# EAGLE board _X2 (EAGLE 8.4.0)
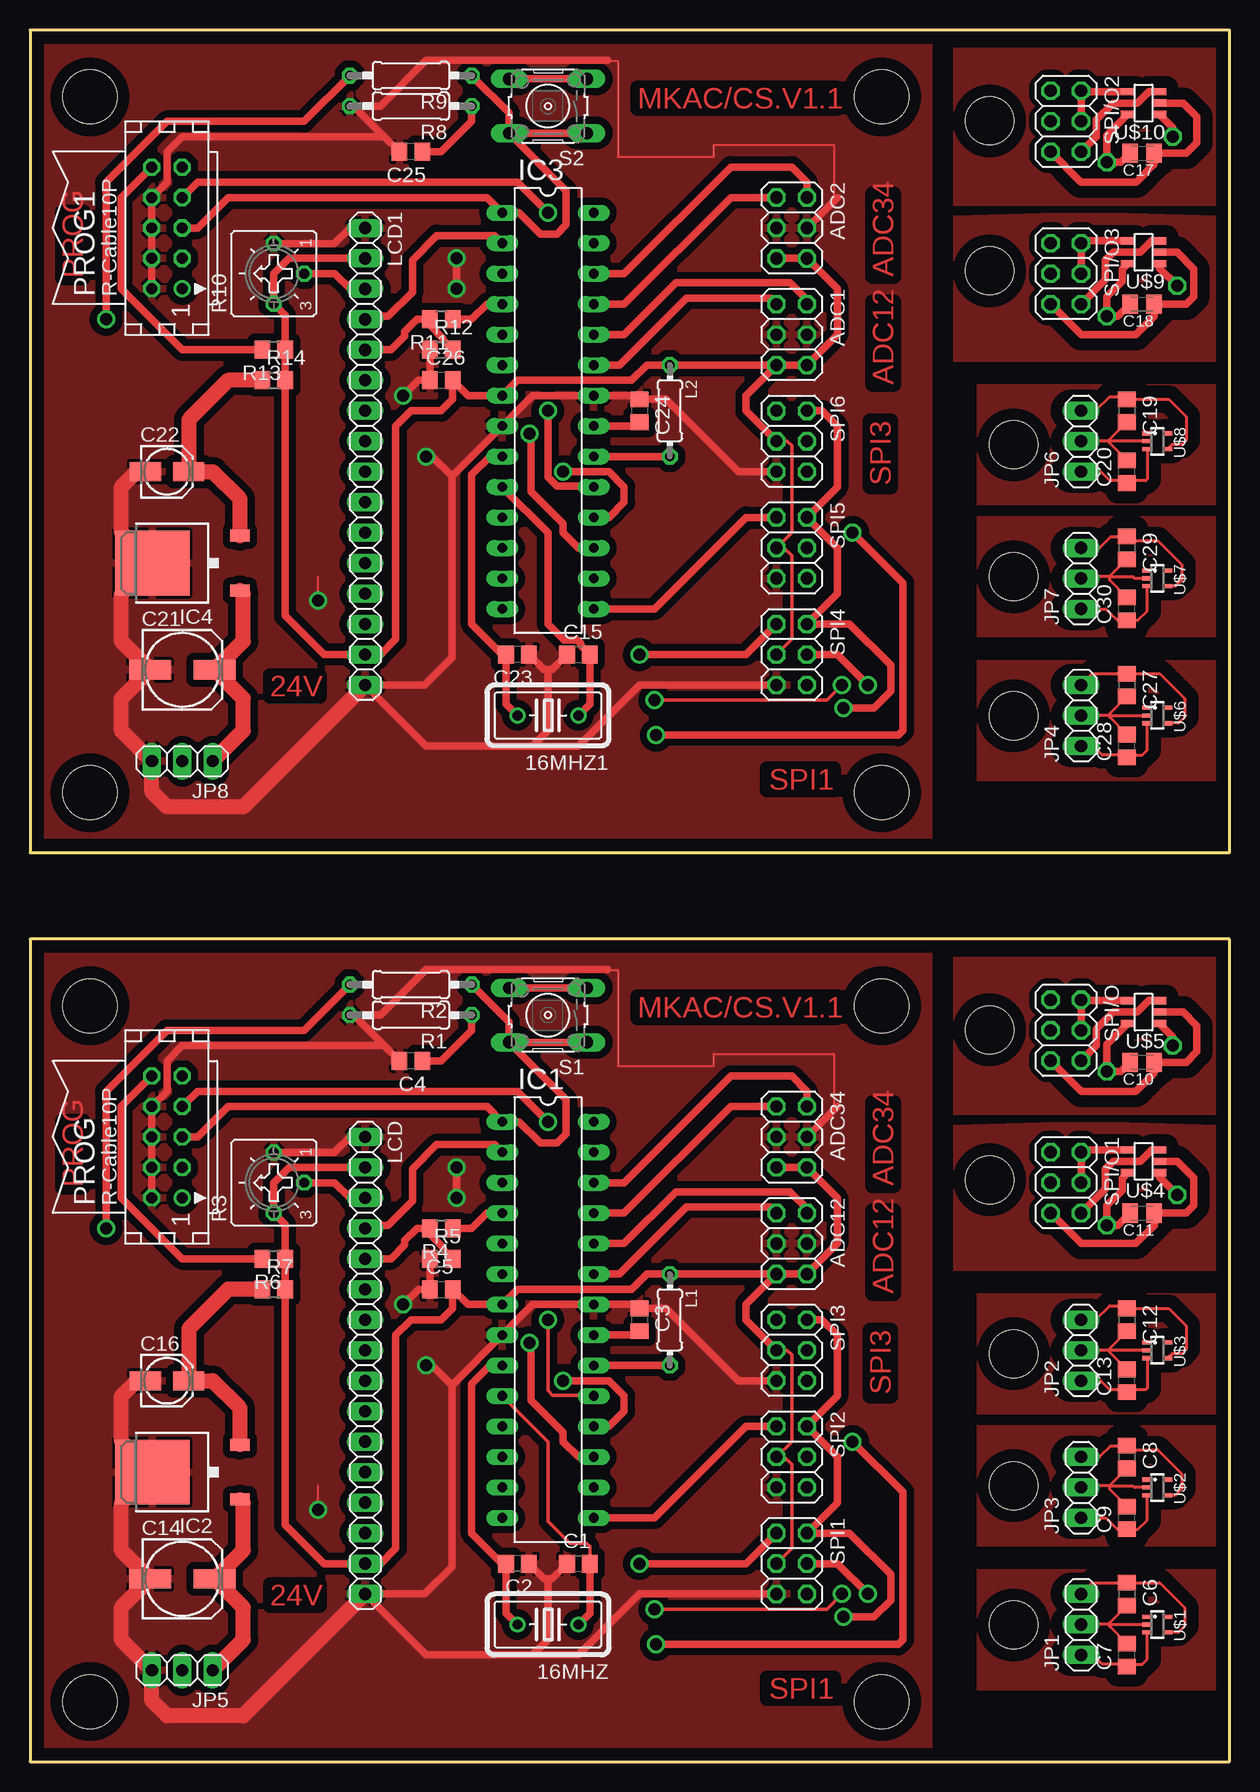
[diagram p0: board, top side]
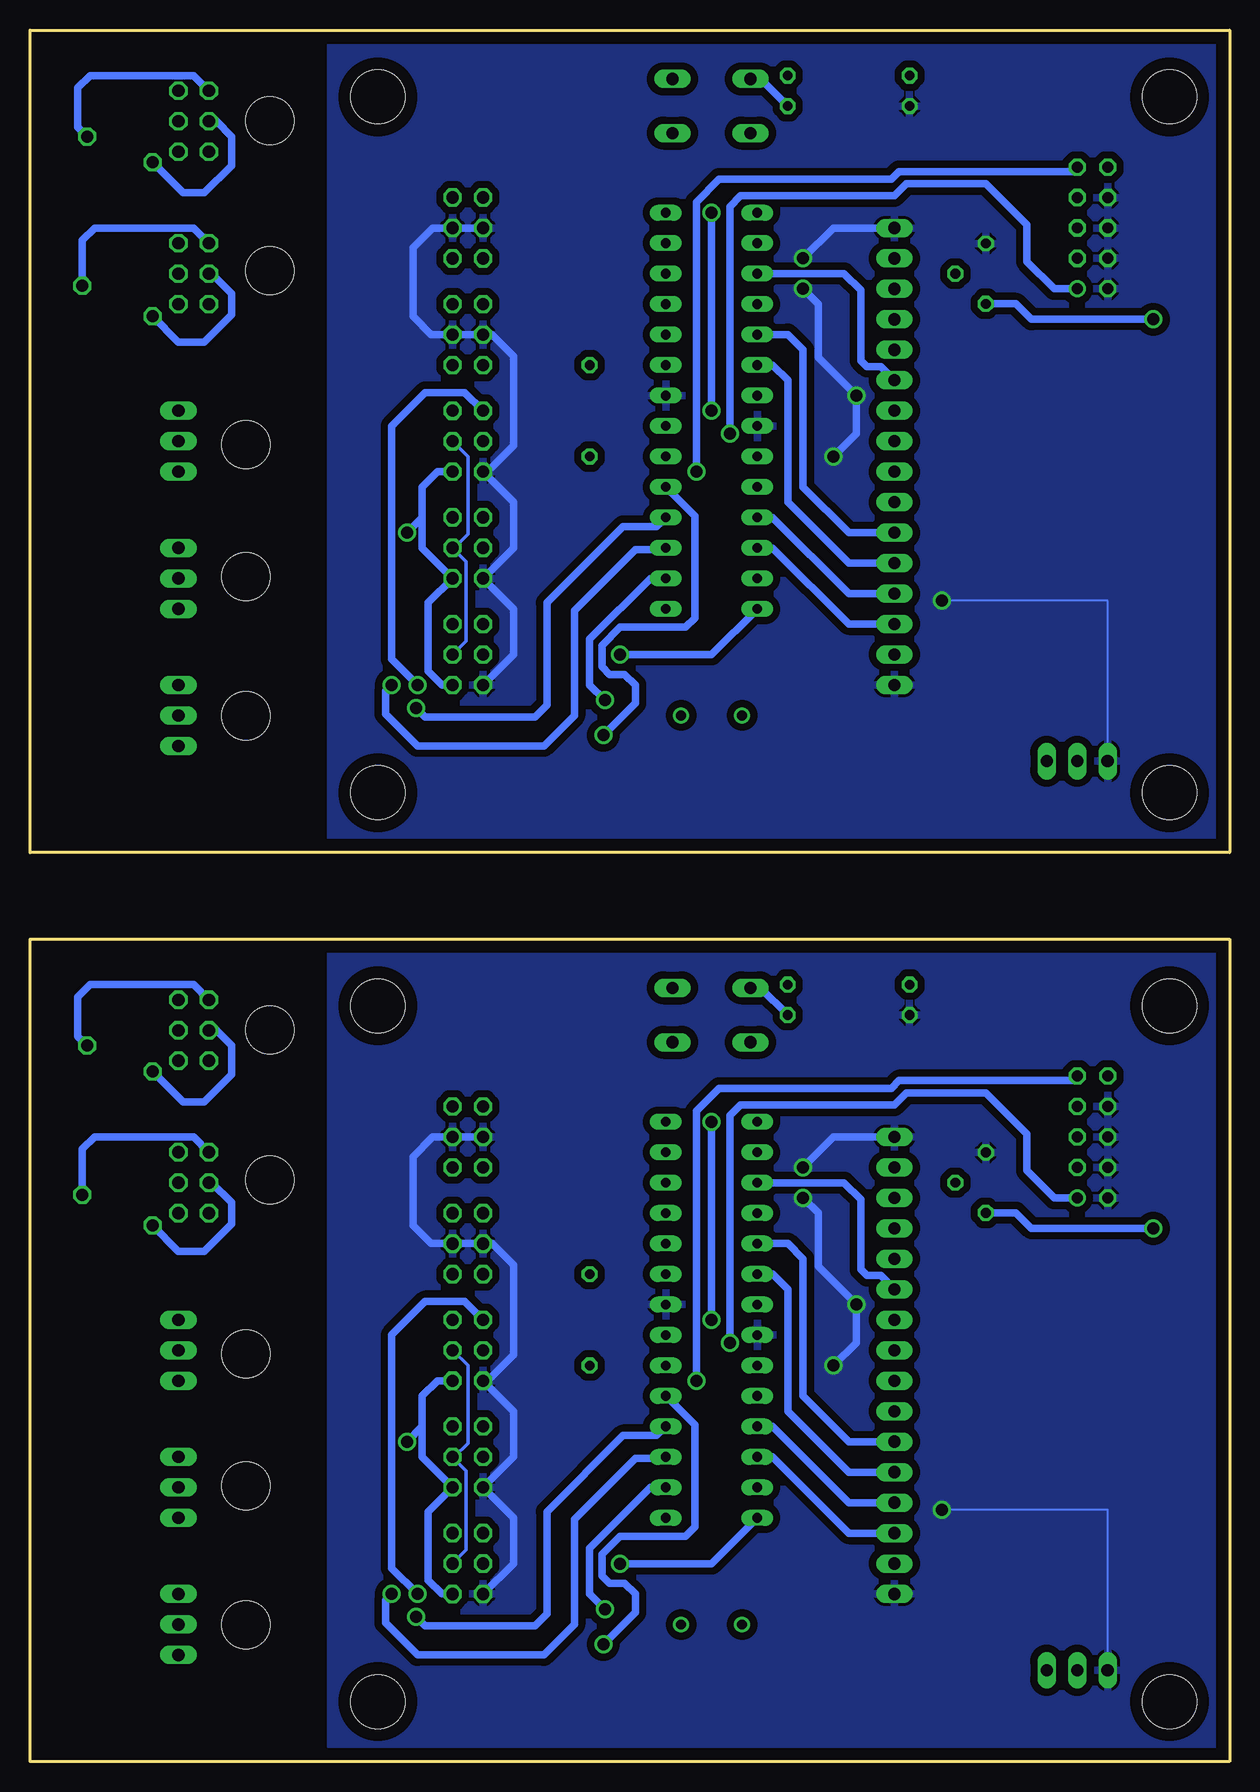
[diagram p1: board, bottom side, seen from below]

Size 100 x 144.34 mm. Coordinates in mm from the lower left corner, seen from the top.
Outline: 0,0 100,0 100,68.57 0,68.57 0,0
Outline: 0,75.77 100,75.77 100,144.34 0,144.34 0,75.77
Copper layers (1*16): Top 0.035mm / dielectric 1.5mm / Bottom 0.035mm
Design rules "default": minimum track width 6mil, minimum drill 0.35mm, track to track 6mil, track to pad 6mil, pad to pad 6mil, via to via 6mil, smd to smd 6mil, copper to edge 40mil, drill to drill 6mil, minimum pad ring 10mil, minimum via ring 8mil, stop-mask expansion 4mil, vias tented up to drill 0mil, thermal gap 10mil
Holes 4.5 mm at 71,5 5,63 71,63 5,5 71,80.77 5,138.77 71,138.77 5,80.77
Holes 4 mm at 82,11.4 82,23 82,34 80,48.5 80,61 82,87.17 82,98.77 82,109.77 80,124.27 80,136.77

## Footprints (pad centres in the part's own frame; a part is rotated, then mirrored left to right if it is on the bottom)
HC18U-V = drill 0.813: 1 -2.54,0; 2 2.54,0
2X03 = drill 1.016 octagon: 1 -2.54,-1.27; 2 -2.54,1.27; 3 0,-1.27; 4 0,1.27; 5 2.54,-1.27; 6 2.54,1.27
C0805 = smd 1.3 x 1.5: 1 -0.95,0; 2 0.95,0
C0805K = smd 1.3 x 1.6: 1 -1,0; 2 1,0
153CLV-0605 = smd 3.5 x 1.6: + 2.7,0; - -2.7,0
153CLV-0405 = smd 2.6 x 1.6: + 1.8,0; - -1.8,0
DIL28-3 = drill 0.813 long: 1 -16.51,-3.81; 2 -13.97,-3.81; 3 -11.43,-3.81; 4 -8.89,-3.81; 5 -6.35,-3.81; 6 -3.81,-3.81; 7 -1.27,-3.81; 8 1.27,-3.81; 9 3.81,-3.81; 10 6.35,-3.81; 11 8.89,-3.81; 12 11.43,-3.81; 13 13.97,-3.81; 14 16.51,-3.81; 15 16.51,3.81; 16 13.97,3.81; 17 11.43,3.81; 18 8.89,3.81; 19 6.35,3.81; 20 3.81,3.81; 21 1.27,3.81; 22 -1.27,3.81; 23 -3.81,3.81; 24 -6.35,3.81; 25 -8.89,3.81; 26 -11.43,3.81; 27 -13.97,3.81; 28 -16.51,3.81
TO252 = smd 1 x 1.6: 1 -2.28,-4.8; 2 2.28,-4.8 | smd 5.4 x 6.2: 3 0,2.5
1X03 = drill 1.016 long: 1 -2.54,0; 2 0,0; 3 2.54,0
0204/7 = drill 0.813 octagon: 1 -3.81,0; 2 3.81,0
1X16 = drill 1.016 long: 1 -19.05,0; 2 -16.51,0; 3 -13.97,0; 4 -11.43,0; 5 -8.89,0; 6 -6.35,0; 7 -3.81,0; 8 -1.27,0; 9 1.27,0; 10 3.81,0; 11 6.35,0; 12 8.89,0; 13 11.43,0; 14 13.97,0; 15 16.51,0; 16 19.05,0
CON10 = drill 0.914: 1 -5.08,-1.27 | drill 0.914 octagon: 2 -5.08,1.27; 3 -2.54,-1.27; 4 -2.54,1.27; 5 0,-1.27; 6 0,1.27; 7 2.54,-1.27; 8 2.54,1.27; 9 5.08,-1.27; 10 5.08,1.27
0207/10 = drill 0.813 octagon: 1 -5.08,0; 2 5.08,0
CT6 = drill 0.813 octagon: A 2.515,0; E -2.515,0; S 0,-2.54
R0805 = smd 1.3 x 1.5: 1 -0.95,0; 2 0.95,0
B3F-10XX = drill 1.016 long: 1 -3.251,2.261; 2 3.251,2.261; 3 -3.251,-2.261; 4 3.251,-2.261
SC70-5L = smd 0.35 x 0.8: 1 -0.65,-0.85; 2 0,-0.85; 3 0.65,-0.85; 4 0.65,0.85; 5 -0.65,0.85
SOT23-5 = smd 0.6 x 1.2: 1 -0.95,-1.306; 2 0,-1.306; 3 0.95,-1.306; 4 0.95,1.306; 5 -0.95,1.306

## Placement (x,y rotation side)
16MHZ  [HC18U-V]  43.18,11.43 180 top
16MHZ1  [HC18U-V]  43.18,87.2 180 top
ADC1  [2X03]  63.5,118.95 270 top
ADC2  [2X03]  63.5,127.84 270 top
ADC12  [2X03]  63.5,43.18 270 top
ADC34  [2X03]  63.5,52.07 270 top
C1  22P  [C0805]  45.72,16.51 0 top
C2  22P  [C0805]  40.64,16.51 180 top
C3  100n  [C0805]  50.8,36.83 270 top
C4  100n  [C0805]  31.75,58.42 180 top
C5  100n  [C0805]  34.29,39.37 0 top
C6  220P  [C0805]  91.44,13.97 270 top
C7  220P  [C0805]  91.44,8.89 90 top
C8  220P  [C0805]  91.44,25.4 270 top
C9  220P  [C0805]  91.44,20.32 90 top
C10  100nF  [C0805K]  92.71,58.29 180 top
C11  100nF  [C0805K]  92.71,45.72 180 top
C12  220P  [C0805]  91.44,36.83 270 top
C13  220P  [C0805]  91.44,31.75 90 top
C14  10u  [153CLV-0605]  12.7,15.24 0 top
C15  22P  [C0805]  45.72,92.28 0 top
C16  1u  [153CLV-0405]  11.43,31.75 0 top
C17  100nF  [C0805K]  92.71,134.07 180 top
C18  100nF  [C0805K]  92.71,121.49 180 top
C19  220P  [C0805]  91.44,112.6 270 top
C20  220P  [C0805]  91.44,107.52 90 top
C21  10u  [153CLV-0605]  12.7,91.01 0 top
C22  1u  [153CLV-0405]  11.43,107.52 0 top
C23  22P  [C0805]  40.64,92.28 180 top
C24  100n  [C0805]  50.8,112.6 270 top
C25  100n  [C0805]  31.75,134.19 180 top
C26  100n  [C0805]  34.29,115.14 0 top
C27  220P  [C0805]  91.44,89.74 270 top
C28  220P  [C0805]  91.44,84.66 90 top
C29  220P  [C0805]  91.44,101.17 270 top
C30  220P  [C0805]  91.44,96.09 90 top
IC1  MEGA8-P  [DIL28-3]  43.18,36.83 270 top
IC2  7805DT  [TO252]  12.7,24.13 90 top
IC3  MEGA8-P  [DIL28-3]  43.18,112.6 270 top
IC4  7805DT  [TO252]  12.7,99.9 90 top
JP1  [1X03]  87.63,11.43 90 top
JP2  [1X03]  87.63,34.29 90 top
JP3  [1X03]  87.63,22.86 90 top
JP4  [1X03]  87.63,87.2 90 top
JP5  [1X03]  12.7,7.62 180 top
JP6  [1X03]  87.63,110.06 90 top
JP7  [1X03]  87.63,98.63 90 top
JP8  [1X03]  12.7,83.39 180 top
L1  10u  [0204/7]  53.34,36.83 270 top
L2  10u  [0204/7]  53.34,112.6 270 top
LCD  [1X16]  27.94,33.02 270 top
LCD1  [1X16]  27.94,108.79 270 top
PROG  [CON10]  11.43,52.07 90 top
PROG1  [CON10]  11.43,127.84 90 top
R1  100  [0207/10]  31.75,62.23 180 top
R2  10k  [0207/10]  31.75,64.77 180 top
R3  [CT6]  20.32,48.26 90 top
R4  0  [R0805]  34.29,44.45 180 top
R5  0  [R0805]  34.29,41.91 0 top
R6  0  [R0805]  20.32,41.91 180 top
R7  0  [R0805]  20.32,39.37 0 top
R8  100  [0207/10]  31.75,138 180 top
R9  10k  [0207/10]  31.75,140.54 180 top
R10  [CT6]  20.32,124.03 90 top
R11  0  [R0805]  34.29,120.22 180 top
R12  0  [R0805]  34.29,117.68 0 top
R13  0  [R0805]  20.32,117.68 180 top
R14  0  [R0805]  20.32,115.14 0 top
S1  [B3F-10XX]  43.18,62.23 180 top
S2  [B3F-10XX]  43.18,138 180 top
SPI1  [2X03]  63.5,16.51 270 top
SPI2  [2X03]  63.5,25.4 270 top
SPI3  [2X03]  63.5,34.29 270 top
SPI4  [2X03]  63.5,92.28 270 top
SPI5  [2X03]  63.5,101.17 270 top
SPI6  [2X03]  63.5,110.06 270 top
SPI/O  [2X03]  86.36,60.96 270 top
SPI/O1  [2X03]  86.36,48.26 270 top
SPI/O2  [2X03]  86.36,136.73 270 top
SPI/O3  [2X03]  86.36,124.03 270 top
U$1  [SC70-5L]  93.98,11.43 270 top
U$2  [SC70-5L]  93.98,22.86 270 top
U$3  [SC70-5L]  93.98,34.29 270 top
U$4  TC77-3.3MCTTR  [SOT23-5]  92.84,50.04 90 top
U$5  TC77-3.3MCTTR  [SOT23-5]  92.84,62.48 90 top
U$6  [SC70-5L]  93.98,87.2 270 top
U$7  [SC70-5L]  93.98,98.63 270 top
U$8  [SC70-5L]  93.98,110.06 270 top
U$9  TC77-3.3MCTTR  [SOT23-5]  92.84,125.81 90 top
U$10  TC77-3.3MCTTR  [SOT23-5]  92.84,138.26 90 top

## Library data of the parts
16MHZ 16MHZ1 = crystal; OC_FARNELL: unknown; OC_NEWARK: unknown
ADC1 ADC2 ADC12 ADC34 JP1-JP8 LCD LCD1 SPI1-SPI6 SPI/O SPI/O1-SPI/O3 = pinhead
C1-C30 L1 L2 R1 R2 R4-R9 R11-R14 = resistor
IC1 IC3 = atmel; OC_FARNELL: unknown; OC_NEWARK: unknown
IC2 IC4 = linear
PROG PROG1 = con-harting; OC_FARNELL: unknown; OC_NEWARK: unknown
R3 R10 = pot
S1 S2 = switch-omron; MPN: B3F-1000; OC_FARNELL: 176432; OC_NEWARK: 36M3542
U$1-U$3 U$6-U$8 = MCP9701T
U$4 U$5 U$9 U$10 = TC77-3.3mcttr

## Nets
5V: ADC12.5 ADC12.6 ADC34.5 ADC34.6 C5.2 IC1.7 L1.1 LCD.2 LCD.15 R2.2 R3.E R6.1 R7.2 SPI1.3 SPI2.3 SPI3.3
5V1: ADC1.5 ADC1.6 ADC2.5 ADC2.6 C26.2 IC3.7 L2.1 LCD1.2 LCD1.15 R9.2 R10.E R13.1 R14.2 SPI4.3 SPI5.3 SPI6.3
ADC1: ADC12.1 IC1.23
ADC2: ADC12.2 IC1.24
ADC3: ADC34.1 IC1.25
ADC4: ADC34.2 IC1.26
ADC5: ADC2.1 IC3.25
ADC6: ADC1.1 IC3.23
ADC7: ADC1.2 IC3.24
ADC8: ADC2.2 IC3.26
D1: IC3.5 LCD1.11
D2: IC3.6 LCD1.12
D3: IC3.11 LCD1.13
D4: IC1.5 LCD.11
D5: IC1.6 LCD.12
D6: IC1.11 LCD.13
D7: IC1.12 LCD.14
D8: IC3.12 LCD1.14
E: IC1.3 LCD.6
E1: IC3.3 LCD1.6
GND: ADC12.3 ADC12.4 ADC34.3 ADC34.4 C1.1 C2.1 C3.1 C4.2 C5.1 C14.- C16.- IC1.8 IC1.22 IC2.3 JP5.3 LCD.1 LCD.16 PROG.2 PROG.4 PROG.6 PROG.8 R1.2 R3.A R5.1 SPI1.5 SPI2.5 SPI3.5
GND1: ADC1.3 ADC1.4 ADC2.3 ADC2.4 C15.1 C21.- C22.- C23.1 C24.1 C25.2 C26.1 IC3.8 IC3.22 IC4.3 JP8.3 LCD1.1 LCD1.16 PROG1.2 PROG1.4 PROG1.6 PROG1.8 R8.2 R10.A R12.1 SPI4.5 SPI5.5 SPI6.5
MISO: IC1.18 PROG.9 SPI1.2 SPI2.2 SPI3.2
MISO1: IC3.18 PROG1.9 SPI4.2 SPI5.2 SPI6.2
MOSI: IC1.17 PROG.1 SPI1.4 SPI2.4 SPI3.4
MOSI1: IC3.17 PROG1.1 SPI4.4 SPI5.4 SPI6.4
N$1: 16MHZ.2 C2.2 IC1.9
N$2: 16MHZ.1 C1.2 IC1.10
N$3: IC1.20 L1.2
N$4: C3.2 IC1.21
N$6: C4.1 R1.1 S1.3 S1.4
N$7: LCD.5 R4.2 R5.2
N$8: C13.1 JP2.1 U$3.3
N$9: LCD.3 R3.S
N$10: C12.2 C13.2 JP2.2 U$3.2
N$11: C12.1 JP2.3 U$3.4
N$12: PROG.10 R6.2
N$13: C7.1 JP1.1 U$1.3
N$14: C6.2 C7.2 JP1.2 U$1.2
N$15: C6.1 JP1.3 U$1.4
N$16: C9.1 JP3.1 U$2.3
N$17: C8.2 C9.2 JP3.2 U$2.2
N$18: C8.1 JP3.3 U$2.4
N$19: C10.2 SPI/O.3 U$5.5
N$20: C10.1 SPI/O.5 U$5.2
N$21: SPI/O.1 U$5.1
N$22: C16.+ IC2.2 R7.1
N$23: SPI/O.2 SPI/O.4 U$5.4
N$24: C14.+ IC2.1 JP5.1
N$25: SPI/O.6 U$5.3
N$27: C11.2 SPI/O1.3 U$4.5
N$28: C11.1 SPI/O1.5 U$4.2
N$29: 16MHZ1.2 C23.2 IC3.9
N$30: SPI/O1.1 U$4.1
N$31: SPI/O1.2 SPI/O1.4 U$4.4
N$32: SPI/O1.6 U$4.3
N$33: 16MHZ1.1 C15.2 IC3.10
N$34: IC3.20 L2.2
N$35: C24.2 IC3.21
N$36: C25.1 R8.1 S2.3 S2.4
N$37: LCD1.3 R10.S
N$38: LCD1.5 R11.2 R12.2
N$39: C20.1 JP6.1 U$8.3
N$40: C19.2 C20.2 JP6.2 U$8.2
N$41: C19.1 JP6.3 U$8.4
N$42: C28.1 JP4.1 U$6.3
N$43: C27.2 C28.2 JP4.2 U$6.2
N$44: C27.1 JP4.3 U$6.4
N$45: C30.1 JP7.1 U$7.3
N$46: C29.2 C30.2 JP7.2 U$7.2
N$47: C29.1 JP7.3 U$7.4
N$48: PROG1.10 R13.2
N$49: C22.+ IC4.2 R14.1
N$50: C21.+ IC4.1 JP8.1
N$51: C17.2 SPI/O2.3 U$10.5
N$52: C17.1 SPI/O2.5 U$10.2
N$53: SPI/O2.1 U$10.1
N$54: SPI/O2.2 SPI/O2.4 U$10.4
N$55: SPI/O2.6 U$10.3
N$56: C18.2 SPI/O3.3 U$9.5
N$57: C18.1 SPI/O3.5 U$9.2
N$58: SPI/O3.1 U$9.1
N$59: SPI/O3.2 SPI/O3.4 U$9.4
N$60: SPI/O3.6 U$9.3
RS: IC1.2 LCD.4
RS1: IC3.2 LCD1.4
RST: IC1.1 PROG.5 R2.1 S1.1 S1.2
RST1: IC3.1 PROG1.5 R9.1 S2.1 S2.2
RW: IC1.4 R4.1
RW1: IC3.4 R11.1
SCK: IC1.19 PROG.7 SPI1.6 SPI2.6 SPI3.6
SCK1: IC3.19 PROG1.7 SPI4.6 SPI5.6 SPI6.6
SS1: IC1.14 SPI1.1
SS2: IC1.15 SPI2.1
SS3: IC1.16 SPI3.1
SS4: IC3.14 SPI4.1
SS5: IC3.15 SPI5.1
SS6: IC3.16 SPI6.1

## Tracks (layer width: path | path; a pad name or v marks a point on that pad's centre or on a via)
5V  (via drill 1)
  Top 0.305: SPI1.3 63.5,17.78 63.5,24.77 62.86,25.4 SPI2.3 63.5,26.67 63.5,33.91 63.12,34.29 SPI3.3
  Top 0.61: ADC12.5 L1.1 51.43,40.64 50.16,39.37 40.64,39.37 IC1.7 36.51,38.1 C5.2 35.24,37.78 34.29,36.83 31.75,36.83 30.48,35.56 30.48,17.78 29.21,16.51 LCD.15 24.51,16.51 21.27,19.75 R7.2 R6.1 21.27,44.8 R3.E 20.32,48.26 21.59,49.53 LCD.2 | ADC12.5 ADC12.6 67.31,43.18 67.31,46.99 ADC34.6 ADC34.5 | ADC12.5 59.69,38.1 59.69,36.83 SPI3.3 | R2.2 22.86,60.96 11.43,60.96 6.35,55.88 v6.35,44.45
  Bottom 0.61: v6.35,44.45 16.51,44.45 17.81,45.75 R3.E
5V1  (via drill 1)
  Top 0.305: SPI4.3 63.5,93.55 63.5,100.54 62.86,101.17 SPI5.3 63.5,102.44 63.5,109.68 63.12,110.06 SPI6.3
  Top 0.61: ADC1.5 L2.1 51.43,116.41 50.16,115.14 40.64,115.14 IC3.7 36.51,113.87 C26.2 35.24,113.55 34.29,112.6 31.75,112.6 30.48,111.33 30.48,93.55 29.21,92.28 LCD1.15 24.51,92.28 21.27,95.53 R14.2 R13.1 21.27,120.57 R10.E 20.32,124.03 21.59,125.3 LCD1.2 | ADC1.5 ADC1.6 67.31,118.95 67.31,122.76 ADC2.6 ADC2.5 | ADC1.5 59.69,113.87 59.69,112.6 SPI6.3 | R9.2 22.86,136.73 11.43,136.73 6.35,131.65 v6.35,120.22
  Bottom 0.61: v6.35,120.22 16.51,120.22 17.81,121.52 R10.E
ADC1
  Top 0.61: ADC12.1 61.72,46.23 54.74,46.23 49.15,40.64 IC1.23
ADC2
  Top 0.61: IC1.24 49.53,43.18 53.85,47.5 63.37,47.5 64.77,46.1 ADC12.2
ADC3
  Top 0.61: ADC34.1 58.42,54.61 49.53,45.72 IC1.25
ADC4
  Top 0.61: IC1.26 49.53,48.26 58.42,57.15 63.5,57.15 64.77,55.88 ADC34.2
ADC5
  Top 0.61: ADC2.1 58.42,130.38 49.53,121.49 IC3.25
ADC6
  Top 0.61: ADC1.1 61.72,122 54.74,122 49.15,116.41 IC3.23
ADC7
  Top 0.61: IC3.24 49.53,118.95 53.85,123.27 63.37,123.27 64.77,121.88 ADC1.2
ADC8
  Top 0.61: IC3.26 49.53,124.03 58.42,132.92 63.5,132.92 64.77,131.65 ADC2.2
D1
  Bottom 0.61: IC3.5 36.83,118.95 35.56,117.68 35.56,106.25 31.75,102.44 LCD1.11
D2
  Bottom 0.61: LCD1.12 31.75,99.9 36.83,104.98 36.83,115.14 38.1,116.41 IC3.6
D3
  Bottom 0.61: IC3.11 38.1,103.71 31.75,97.36 LCD1.13
D4
  Bottom 0.61: IC1.5 36.83,43.18 35.56,41.91 35.56,30.48 31.75,26.67 LCD.11
D5
  Bottom 0.61: LCD.12 31.75,24.13 36.83,29.21 36.83,39.37 38.1,40.64 IC1.6
D6
  Bottom 0.61: IC1.11 38.1,27.94 31.75,21.59 LCD.13
D7
  Bottom 0.61: IC1.12 38.1,25.4 31.75,19.05 LCD.14
D8
  Bottom 0.61: IC3.12 38.1,101.17 31.75,94.82 LCD1.14
E
  Bottom 0.61: LCD.6 29.08,40.51 30.23,40.51 30.73,41.02 30.73,46.86 32.13,48.26 IC1.3
E1
  Bottom 0.61: LCD1.6 29.08,116.29 30.23,116.29 30.73,116.8 30.73,122.64 32.13,124.03 IC3.3
GND  (via drill 1)
  Top 0.152: v24,21 24,23 | 48.15,66.04 48.15,66 49,66 49,58 57,58 57,59 67,59 67,54.15 66.85,54.15
  Top 0.61: SPI3.5 59.05,31.75 53.02,37.78 C3.1 50.48,38.1 IC1.22 41.91,38.1 IC1.8 35.18,31.37 | 41.91,8.89 33.02,8.89 LCD.16 32.89,13.97 35.18,16.26 35.18,31.37 | 41.91,8.89 43.18,10.16 43.18,15.24 | C2.1 42.86,15.24 43.18,15.24 | 43.18,15.24 43.5,15.24 C1.1 | SPI1.5 50.8,13.97 45.72,8.89 41.91,8.89 | R3.A 25.37,50.78 26.67,52.07 LCD.1 | 29.37,59.85 C4.2 | 29.37,59.85 26.99,62.23 R1.2 29.21,62.23 33.02,66.04 48.15,66.04 | PROG.2 PROG.4 PROG.6 PROG.8 11.43,55.88 11.43,58.42 12.7,59.69 29.21,59.69 29.37,59.85 | 67.31,54.61 66.85,54.15 ADC34.4 | v31.11,38.1 32.38,39.37 C5.1 R5.1 | v33.02,33.02 33.53,33.02 35.18,31.37 | v35.56,46.99 v35.56,49.53
  Top 1.27: C16.- 8.89,31.75 7.62,30.48 7.62,26.71 IC2.3 7.62,21.55 7.62,17.62 C14.- 7.62,12.86 7.62,10.16 JP5.3 10.16,5.08 11.43,3.81 17.78,3.81 LCD.16
  Bottom 0.152: JP5.3 10.16,21 v24,21
  Bottom 0.61: SPI1.5 59.69,16.51 59.69,20.32 SPI2.5 59.69,25.4 59.69,29.21 SPI3.5 61.85,31.75 59.69,33.91 59.69,41.4 61.47,43.18 ADC12.3 ADC12.4 66.55,43.18 68.07,44.7 68.07,50.42 66.42,52.07 ADC34.4 ADC34.3 | v33.02,33.02 31.11,34.93 v31.11,38.1 34.29,41.28 34.29,45.72 v35.56,46.99 | v35.56,49.53 33.02,52.07 LCD.1
  pour Top (isolate 0.61): 1.27,1.27 1.27,68.58 74.93,68.58 74.93,1.27
  pour Bottom (isolate 0.61): 1.27,1.27 1.27,68.58 74.93,68.58 74.93,1.27
GND1  (via drill 1)
  Top 0.152: v24,96.77 24,98.77 | 48.15,141.81 48.15,141.77 49,141.77 49,133.77 57,133.77 57,134.77 67,134.77 67,129.92 66.85,129.92
  Top 0.61: SPI6.5 59.05,107.52 53.02,113.55 C24.1 50.48,113.87 IC3.22 41.91,113.87 IC3.8 35.18,107.14 | 41.91,84.66 33.02,84.66 LCD1.16 32.89,89.74 35.18,92.03 35.18,107.14 | 41.91,84.66 43.18,85.93 43.18,91.01 | C23.1 42.86,91.01 43.18,91.01 | 43.18,91.01 43.5,91.01 C15.1 | SPI4.5 50.8,89.74 45.72,84.66 41.91,84.66 | R10.A 25.37,126.55 26.67,127.84 LCD1.1 | 29.37,135.62 C25.2 | 29.37,135.62 26.99,138 R8.2 29.21,138 33.02,141.81 48.15,141.81 | PROG1.2 PROG1.4 PROG1.6 PROG1.8 11.43,131.65 11.43,134.19 12.7,135.46 29.21,135.46 29.37,135.62 | 67.31,130.38 66.85,129.92 ADC2.4 | v31.11,113.87 32.38,115.14 C26.1 R12.1 | v33.02,108.79 33.53,108.79 35.18,107.14 | v35.56,122.76 v35.56,125.3
  Top 1.27: C22.- 8.89,107.52 7.62,106.25 7.62,102.48 IC4.3 7.62,97.32 7.62,93.39 C21.- 7.62,88.63 7.62,85.93 JP8.3 10.16,80.85 11.43,79.58 17.78,79.58 LCD1.16
  Bottom 0.152: JP8.3 10.16,96.77 v24,96.77
  Bottom 0.61: SPI4.5 59.69,92.28 59.69,96.09 SPI5.5 59.69,101.17 59.69,104.98 SPI6.5 61.85,107.52 59.69,109.68 59.69,117.18 61.47,118.95 ADC1.3 ADC1.4 66.55,118.95 68.07,120.48 68.07,126.19 66.42,127.84 ADC2.4 ADC2.3 | v33.02,108.79 31.11,110.7 v31.11,113.87 34.29,117.05 34.29,121.49 v35.56,122.76 | v35.56,125.3 33.02,127.84 LCD1.1
  pour Top (isolate 0.61): 1.27,77.04 1.27,144.35 74.93,144.35 74.93,77.04
  pour Bottom (isolate 0.61): 1.27,77.04 1.27,144.35 74.93,144.35 74.93,77.04
MISO  (via drill 1)
  Top 0.61: SPI3.2 66.04,36.83 67.31,35.56 67.31,30.48 SPI2.2 67.31,25.4 67.31,21.59 SPI1.2 68.33,19.05 71.75,15.62 71.75,13.46 70.36,12.07 v67.82,12.07 | v44.45,31.75 48.26,31.75 49.53,30.48 49.53,29.21 48.26,27.94 IC1.18
  Bottom 0.61: IC1.18 47.75,27.18 50.55,27.18 56.9,20.83 56.9,12.32 57.91,11.3 67.06,11.3 v67.82,12.07 | PROG.9 13.08,56.77 27.56,56.77 28.19,56.13 42.54,56.13 44.45,54.23 v44.45,31.75
MISO1  (via drill 1)
  Top 0.61: SPI6.2 66.04,112.6 67.31,111.33 67.31,106.25 SPI5.2 67.31,101.17 67.31,97.36 SPI4.2 68.33,94.82 71.75,91.4 71.75,89.24 70.36,87.84 v67.82,87.84 | v44.45,107.52 48.26,107.52 49.53,106.25 49.53,104.98 48.26,103.71 IC3.18
  Bottom 0.61: IC3.18 47.75,102.95 50.55,102.95 56.9,96.6 56.9,88.09 57.91,87.08 67.06,87.08 v67.82,87.84 | PROG1.9 13.08,132.54 27.56,132.54 28.19,131.91 42.54,131.91 44.45,130 v44.45,107.52
MOSI  (via drill 1)
  Top 0.61: v69.85,13.97 67.31,16.51 SPI1.4 | IC1.17 45.72,25.4 44.45,26.67 44.45,27.43 41.78,30.1 41.78,34.8 v41.66,34.93
  Bottom 0.305: SPI3.4 63.5,33.02 63.5,26.54 64.64,25.4 SPI2.4 63.63,24.26 63.63,17.65 SPI1.4
  Bottom 0.61: IC1.17 47.12,25.27 49.53,25.27 54.61,20.19 54.61,11.43 57.15,8.89 67.69,8.89 70.36,11.56 70.36,13.46 v69.85,13.97 | v41.66,34.93 41.66,53.85 40.77,54.74 27.94,54.74 26.92,55.75 20.32,55.75 16.89,52.32 16.89,49.28 14.6,46.99 PROG.1
MOSI1  (via drill 1)
  Top 0.61: v69.85,89.74 67.31,92.28 SPI4.4 | IC3.17 45.72,101.17 44.45,102.44 44.45,103.21 41.78,105.87 41.78,110.57 v41.66,110.7
  Bottom 0.305: SPI6.4 63.5,108.79 63.5,102.32 64.64,101.17 SPI5.4 63.63,100.03 63.63,93.43 SPI4.4
  Bottom 0.61: IC3.17 47.12,101.05 49.53,101.05 54.61,95.97 54.61,87.2 57.15,84.66 67.69,84.66 70.36,87.33 70.36,89.24 v69.85,89.74 | v41.66,110.7 41.66,129.62 40.77,130.51 27.94,130.51 26.92,131.53 20.32,131.53 16.89,128.1 16.89,125.05 14.6,122.76 PROG1.1
N$1
  Top 0.61: 16MHZ.2 39.69,12.38 C2.2 39.37,16.51 36.83,19.05 36.83,31.5 38.48,33.15 38.61,33.02 IC1.9
N$2
  Top 0.305: 43.18,20.05 43.2,20.03 | 43.2,20.03 45.01,18.22 46.39,18.22 46.67,17.93 C1.2 | 43.2,20.03 43.2,26.65 IC1.10
  Top 0.61: C1.2 46.67,12.38 16MHZ.1
N$3
  Top 0.61: L1.2 IC1.20
N$4
  Top 0.61: IC1.21 50.48,35.56 C3.2
N$5
  pour Top (isolate 1.016): 77,54 99,54 99,67 77,67
  pour Top (isolate 1.016): 77,41 99,41 99,53 arc5 77,53
N$6
  Top 0.61: C4.1 34.29,58.42 36.83,60.96 R1.1 | S1.3 S1.4
  Bottom 0.61: R1.1 39.09,64.49 S1.4
N$7
  Top 0.61: LCD.5 30.1,41.91 31.24,43.05 31.24,43.43 32.26,44.45 R4.2 33.34,43.96 34.45,42.85 34.45,42.7 R5.2
N$8
  Top 0.254: JP2.1 89.25,31.75 90,31 91.24,31 | 91.24,31 C13.1 | U$3.3 93.13,31.13 93,31 91.24,31
N$9
  Top 0.61: LCD.3 26.67,46.99 25.4,48.26 R3.S
N$10
  Top 0.254: 89.85,34.29 JP2.2 | 89.85,34.29 C12.2 | C13.2 89.85,34.29 | U$3.2 89.85,34.29
N$11
  Top 0.254: JP2.3 88.83,36.83 90,38 91.22,38 C12.1 94.93,37.78 96.39,36.32 96.39,34.39 96,34 95.19,34 U$3.4
N$12
  Top 0.61: PROG.10 7.62,54.61 7.62,46.99 12.7,41.91 R6.2
N$13
  Top 0.254: JP1.1 88.65,8.89 89.41,8.13 91.25,8.13 C7.1 91.63,8.13 92.71,8.13 93.13,8.55 U$1.3
N$14
  Top 0.254: 90,11.43 U$1.2 | 90,11.43 JP1.2 | C6.2 90,11.58 90,11.43 | C7.2 90,11.28 90,11.43
N$15
  Top 0.254: JP1.3 88.58,14.92 C6.1 94.17,14.92 96.27,12.83 96.27,11.3 95.74,10.78 U$1.4
N$16
  Top 0.254: JP3.1 89.68,20.32 91,19 91.07,19 C9.1 92.37,19.37 93.13,20.13 U$2.3
N$17
  Top 0.254: U$2.2 92.07,22.86 91.95,22.99 90,22.99 | 90,22.99 89,22.99 | 89,22.99 87.76,22.99 JP3.2 | C8.2 89.98,22.99 89,22.99 | C9.2 90,22.71 90,22.99
N$18
  Top 0.254: U$2.4 95.49,22.21 96.01,22.73 96.01,23.99 94,26 91.79,26 C8.1 91.38,26.29 90.04,26.29 89.15,25.4 JP3.3
N$19  (via drill 1)
  Top 0.61: C10.2 90.95,57.53 v89.79,57.53 89.79,59.79 U$5.5
  Bottom 0.61: SPI/O.3 84.45,60.96 83.18,59.69 83.18,57.28 85.47,54.99 87.25,54.99 v89.79,57.53
N$20
  Top 0.61: SPI/O.5 87.54,55.97 arc45 87.76,55.88 92.07,55.88 arc45 92.29,55.97 93.62,57.3 arc45 93.71,57.52 C10.1 96.39,58.29 97.28,59.18 97.28,61.34 96.14,62.48 U$5.2
N$21  (via drill 1)
  Top 0.61: v95.25,59.69 95.25,60.43 U$5.1
  Bottom 0.61: SPI/O.1 86.36,64.77 95,64.77 96.01,63.75 96.01,60.45 v95.25,59.69
N$22
  Top 1.27: IC2.2 17.5,29.49 15.24,31.75 C16.+ 13.23,36.09 16.51,39.37 R7.1
N$23
  Top 0.61: SPI/O.4 SPI/O.2 87.7,63.43 U$5.4
N$24
  Top 1.27: JP5.1 17.78,10.16 17.78,12.86 C14.+ 17.78,17.62 17.78,21.57 IC2.1
N$25
  Top 0.61: SPI/O.6 88.9,59.69 88.9,61.09 90.3,62.48 92.33,62.48 93.28,63.43 U$5.3
N$26
  pour Top (isolate 1.016): 79,39 99,39 99,29 79,29
  pour Top (isolate 1.016): 79,28 99,28 99,18 79,18
  pour Top (isolate 1.016): 79,16 99,16 99,6 79,6
N$27  (via drill 1)
  Top 0.61: U$4.5 91.06,48.62 91.06,47.63 89.79,46.36 v89.79,44.7 90.69,44.7 C11.2
  Bottom 0.61: SPI/O1.3 84.84,48.26 83.18,46.61 83.18,44.83 85.47,42.55 87.63,42.55 v89.79,44.7
N$28
  Top 0.61: SPI/O1.5 87.63,43.18 92.2,43.18 93.73,44.7 93.73,45.7 C11.1 96.39,45.72 97.03,46.36 97.03,48.64 95.63,50.04 U$4.2
N$29
  Top 0.61: 16MHZ1.2 39.69,88.15 C23.2 39.37,92.28 36.83,94.82 36.83,107.27 38.48,108.92 38.61,108.79 IC3.9
N$30  (via drill 1)
  Top 0.61: v95.63,47.24 94.14,48.73 U$4.1
  Bottom 0.61: SPI/O1.1 86.36,52.07 94.61,52.07 95.63,51.05 v95.63,47.24
N$31
  Top 0.61: SPI/O1.4 SPI/O1.2 87.82,50.99 U$4.4
N$32
  Top 0.61: SPI/O1.6 89.66,47.75 89.66,49.4 90.3,50.04 92.58,50.04 93.53,50.99 U$4.3
N$33
  Top 0.61: 16MHZ1.1 46.67,88.15 C15.2 45.88,93.08 45.88,93.22 45.61,93.49 44.51,93.49 43.18,94.82 43.18,102.44 IC3.10
N$34
  Top 0.61: L2.2 IC3.20
N$35
  Top 0.61: IC3.21 50.48,111.33 C24.2
N$36
  Top 0.61: C25.1 34.29,134.19 36.83,136.73 R8.1 | S2.3 S2.4
  Bottom 0.61: R8.1 39.09,140.27 S2.4
N$37
  Top 0.61: LCD1.3 26.67,122.76 25.4,124.03 R10.S
N$38
  Top 0.61: LCD1.5 30.1,117.68 31.24,118.83 31.24,119.21 32.26,120.22 R11.2 33.34,119.73 34.45,118.62 34.45,118.48 R12.2
N$39
  Top 0.254: JP6.1 89.25,107.52 90,106.77 91.24,106.77 | 91.24,106.77 C20.1 | U$8.3 93.13,106.9 93,106.77 91.24,106.77
N$40
  Top 0.254: 89.85,110.06 JP6.2 | 89.85,110.06 C19.2 | C20.2 89.85,110.06 | U$8.2 89.85,110.06
N$41
  Top 0.254: JP6.3 88.83,112.6 90,113.77 91.22,113.77 C19.1 94.93,113.55 96.39,112.1 96.39,110.17 96,109.77 95.19,109.77 U$8.4
N$42
  Top 0.254: JP4.1 88.65,84.66 89.41,83.9 91.25,83.9 C28.1 91.63,83.9 92.71,83.9 93.13,84.32 U$6.3
N$43
  Top 0.254: 90,87.2 U$6.2 | 90,87.2 JP4.2 | C27.2 90,87.35 90,87.2 | C28.2 90,87.05 90,87.2
N$44
  Top 0.254: JP4.3 88.58,90.69 C27.1 94.17,90.69 96.27,88.6 96.27,87.08 95.74,86.55 U$6.4
N$45
  Top 0.254: JP7.1 89.68,96.09 91,94.77 91.07,94.77 C30.1 92.37,95.14 93.13,95.9 U$7.3
N$46
  Top 0.254: U$7.2 92.07,98.63 91.95,98.76 90,98.76 | 90,98.76 89,98.76 | 89,98.76 87.76,98.76 JP7.2 | C29.2 89.98,98.76 89,98.76 | C30.2 90,98.48 90,98.76
N$47
  Top 0.254: U$7.4 95.49,97.98 96.01,98.51 96.01,99.76 94,101.77 91.79,101.77 C29.1 91.38,102.06 90.04,102.06 89.15,101.17 JP7.3
N$48
  Top 0.61: PROG1.10 7.62,130.38 7.62,122.76 12.7,117.68 R13.2
N$49
  Top 1.27: IC4.2 17.5,105.26 15.24,107.52 C22.+ 13.23,111.86 16.51,115.14 R14.1
N$50
  Top 1.27: JP8.1 17.78,85.93 17.78,88.63 C21.+ 17.78,93.39 17.78,97.34 IC4.1
N$51  (via drill 1)
  Top 0.61: C17.2 90.95,133.31 v89.79,133.31 89.79,135.57 U$10.5
  Bottom 0.61: SPI/O2.3 84.45,136.73 83.18,135.46 83.18,133.05 85.47,130.77 87.25,130.77 v89.79,133.31
N$52
  Top 0.61: SPI/O2.5 87.54,131.75 arc45 87.76,131.65 92.07,131.65 arc45 92.29,131.75 93.62,133.07 arc45 93.71,133.29 C17.1 96.39,134.07 97.28,134.96 97.28,137.12 96.14,138.26 U$10.2
N$53  (via drill 1)
  Top 0.61: v95.25,135.46 95.25,136.2 U$10.1
  Bottom 0.61: SPI/O2.1 86.36,140.54 95,140.54 96.01,139.53 96.01,136.23 v95.25,135.46
N$54
  Top 0.61: SPI/O2.4 SPI/O2.2 87.7,139.21 U$10.4
N$55
  Top 0.61: SPI/O2.6 88.9,135.46 88.9,136.86 90.3,138.26 92.33,138.26 93.28,139.21 U$10.3
N$56  (via drill 1)
  Top 0.61: U$9.5 91.06,124.39 91.06,123.4 89.79,122.13 v89.79,120.48 90.69,120.48 C18.2
  Bottom 0.61: SPI/O3.3 84.84,124.03 83.18,122.38 83.18,120.61 85.47,118.32 87.63,118.32 v89.79,120.48
N$57
  Top 0.61: SPI/O3.5 87.63,118.95 92.2,118.95 93.73,120.48 93.73,121.48 C18.1 96.39,121.49 97.03,122.13 97.03,124.42 95.63,125.81 U$9.2
N$58  (via drill 1)
  Top 0.61: v95.63,123.02 94.14,124.51 U$9.1
  Bottom 0.61: SPI/O3.1 86.36,127.84 94.61,127.84 95.63,126.83 v95.63,123.02
N$59
  Top 0.61: SPI/O3.4 SPI/O3.2 87.82,126.76 U$9.4
N$60
  Top 0.61: SPI/O3.6 89.66,123.53 89.66,125.18 90.3,125.81 92.58,125.81 93.53,126.76 U$9.3
N$61
  pour Top (isolate 1.016): 77,129.77 99,129.77 99,142.77 77,142.77
  pour Top (isolate 1.016): 77,116.77 99,116.77 99,128.77 arc5 77,128.77
N$62
  pour Top (isolate 1.016): 79,114.77 99,114.77 99,104.77 79,104.77
  pour Top (isolate 1.016): 79,103.77 99,103.77 99,93.77 79,93.77
  pour Top (isolate 1.016): 79,91.77 99,91.77 99,81.77 79,81.77
RS
  Top 0.61: LCD.4 28.19,44.7 29.84,44.7 31.88,46.74 31.88,49.4 33.91,51.44 38.73,51.44 IC1.2
RS1
  Top 0.61: LCD1.4 28.19,120.48 29.84,120.48 31.88,122.51 31.88,125.18 33.91,127.21 38.73,127.21 IC3.2
RST
  Top 0.61: PROG.5 13.97,52.07 16.51,54.61 38.1,54.61 IC1.1 40.77,53.34 42.54,51.56 43.94,51.56 44.7,52.32 44.7,55.19 S1.2 | S1.2 39.93,61.67 R2.1 | S1.1 S1.2
RST1
  Top 0.61: PROG1.5 13.97,127.84 16.51,130.38 38.1,130.38 IC3.1 40.77,129.11 42.54,127.34 43.94,127.34 44.7,128.1 44.7,130.97 S2.2 | S2.2 39.93,137.45 R9.1 | S2.1 S2.2
RW
  Top 0.61: IC1.4 38.1,45.72 36.83,44.45 R4.1
RW1
  Top 0.61: IC3.4 38.1,121.49 36.83,120.22 R11.1
SCK  (via drill 1)
  Top 0.305: v43.18,36.83 43.18,30.95 43.58,30.55 46.92,30.55 IC1.19
  Top 0.61: v68.58,26.67 72.77,22.48 72.77,10.16 72.39,9.78 v52.2,9.78 | IC1.19 46.93,30.54 | v43.18,53.34 40.64,55.88 13.97,55.88 PROG.7
  Bottom 0.61: SPI1.6 65.66,13.97 66.8,15.11 66.8,20.83 SPI2.6 67.31,25.4 67.31,27.94 | 67.31,27.94 67.31,30.48 66.04,31.75 SPI3.6 | 67.31,27.94 v68.58,26.67 | v52.2,9.78 49.53,12.45 49.53,13.97 50.42,14.86 51.69,14.86 52.32,15.49 52.32,17.27 50.8,18.8 45.34,18.8 44.58,19.56 44.58,28.07 IC1.19 | v43.18,36.83 v43.18,53.34
SCK1  (via drill 1)
  Top 0.61: v68.58,102.44 72.77,98.25 72.77,85.93 72.39,85.55 v52.2,85.55 | IC3.19 46.93,106.32 43.95,106.32 43.18,107.09 v43.18,112.6 | v43.18,129.11 40.64,131.65 13.97,131.65 PROG1.7
  Bottom 0.61: SPI4.6 65.66,89.74 66.8,90.89 66.8,96.6 SPI5.6 67.31,101.17 67.31,103.71 | 67.31,103.71 67.31,106.25 66.04,107.52 SPI6.6 | 67.31,103.71 v68.58,102.44 | v52.2,85.55 49.53,88.22 49.53,89.74 50.42,90.63 51.69,90.63 52.32,91.27 52.32,93.05 50.8,94.57 45.34,94.57 44.58,95.33 44.58,103.84 IC3.19 | v43.18,112.6 v43.18,129.11
SS1  (via drill 1)
  Top 0.61: v50.8,16.51 59.69,16.51 SPI1.1
  Bottom 0.61: IC1.14 43.18,16.51 v50.8,16.51
SS2
  Top 0.61: IC1.15 52.07,20.32 59.69,27.94 SPI2.1
SS3  (via drill 1)
  Top 0.305: v52.07,12.7 66.42,12.7 v67.69,13.97
  Bottom 0.61: SPI3.1 63.75,38.35 67.06,38.35 69.85,35.56 69.85,16.13 v67.69,13.97 | v52.07,12.7 53.34,13.97 53.34,17.78 48.26,22.86 IC1.16
SS4  (via drill 1)
  Top 0.61: v50.8,92.28 59.69,92.28 SPI4.1
  Bottom 0.61: IC3.14 43.18,92.28 v50.8,92.28
SS5
  Top 0.61: IC3.15 52.07,96.09 59.69,103.71 SPI5.1
SS6  (via drill 1)
  Top 0.305: v52.07,88.47 66.42,88.47 v67.69,89.74
  Bottom 0.61: SPI6.1 63.75,114.13 67.06,114.13 69.85,111.33 69.85,91.9 v67.69,89.74 | v52.07,88.47 53.34,89.74 53.34,93.55 48.26,98.63 IC3.16

## Text on the board
Top: MKAC/CS.V1.1 | ADC34 | PROG | ADC12 | SPI3 | 24V | SPI1 | MKAC/CS.V1.1 | PROG | ADC34 | ADC12 | SPI3 | 24V | SPI1
_tnames: SPI/O | R2 | R1 | U$5 | S1 | C4 | C10 | IC1 | ADC34 | LCD | SPI/O1 | U$4 | ADC12 | PROG | R3 | C11 | R5 | R4 | R7 | R6 | C5 | L1 | C3 | SPI3 | C12 | U$3 | C16 | JP2 | C13 | SPI2 | C8 | U$2 | IC2 | SPI1 | JP3 | C9 | C14 | C1 | C2 | C6 | U$1 | 16MHZ | JP1 | C7 | JP5 | SPI/O | R2 | R1 | U$5 | S1 | C4 | C10 | IC1 | ADC34 | LCD | SPI/O1 | U$4 | ADC12 | PROG | R3 | C11 | R5 | R4 | R7 | R6 | C5 | L1 | C3 | SPI3 | C12 | U$3 | C16 | JP2 | C13 | SPI2 | C8 | U$2 | IC2 | SPI1 | C14 | JP3 | C9 | C1 | C2 | C6 | U$1 | 16MHZ | JP1 | C7 | JP5